# EAGLE board plan (EAGLE 6.2)
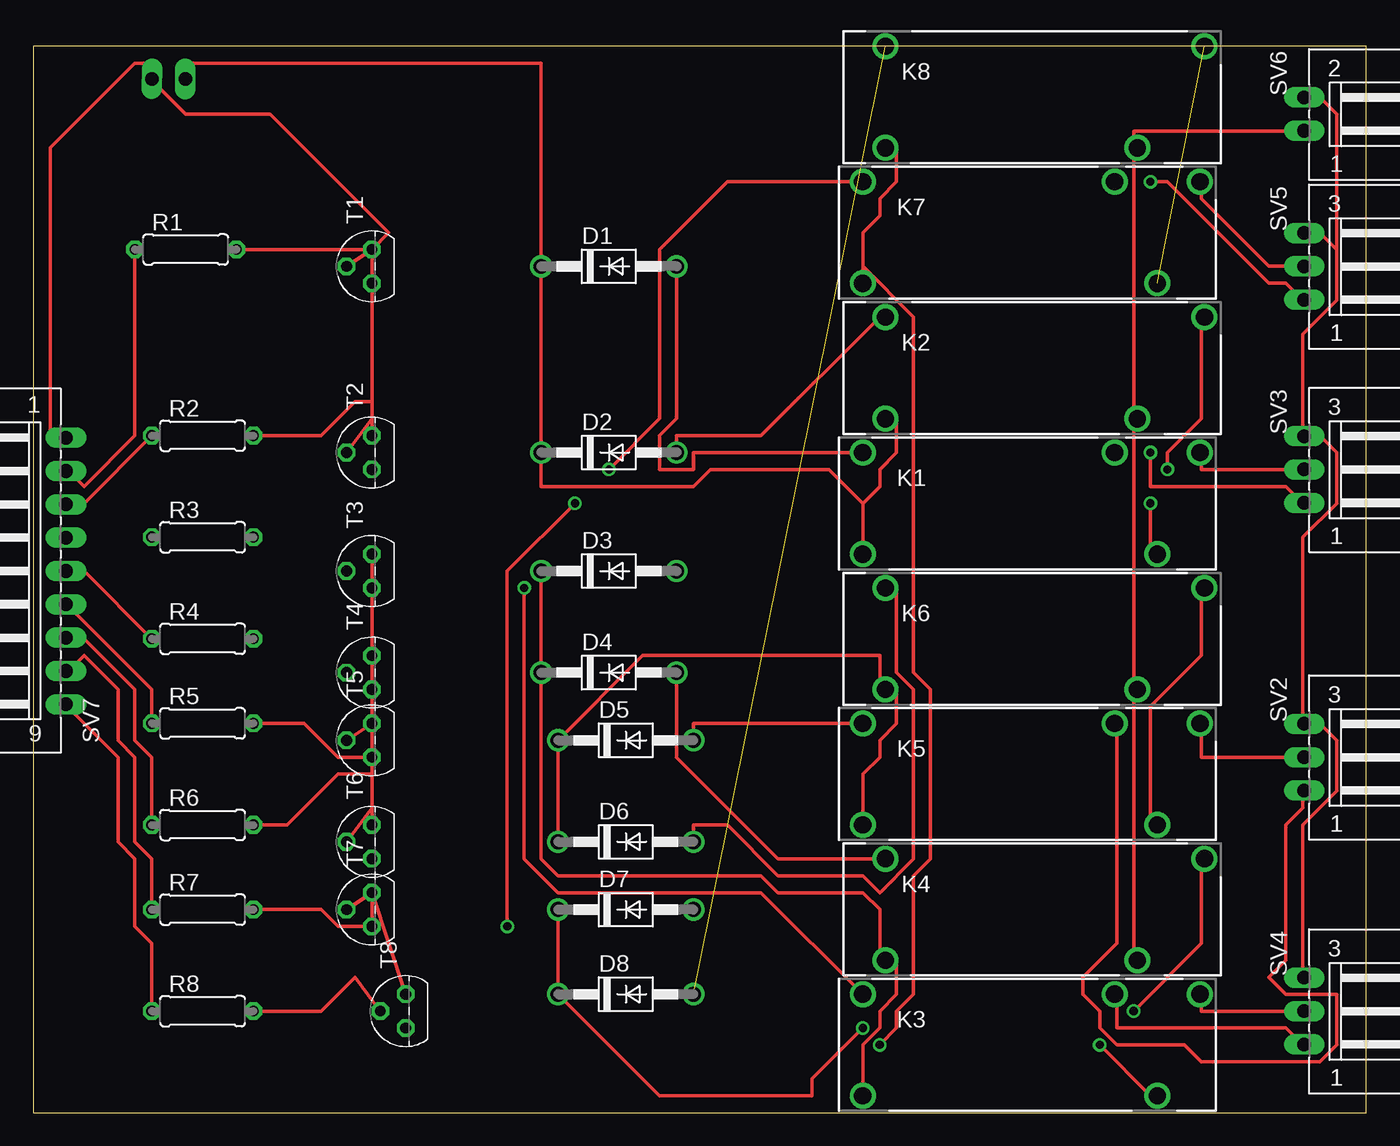
[diagram p0: board, top side]
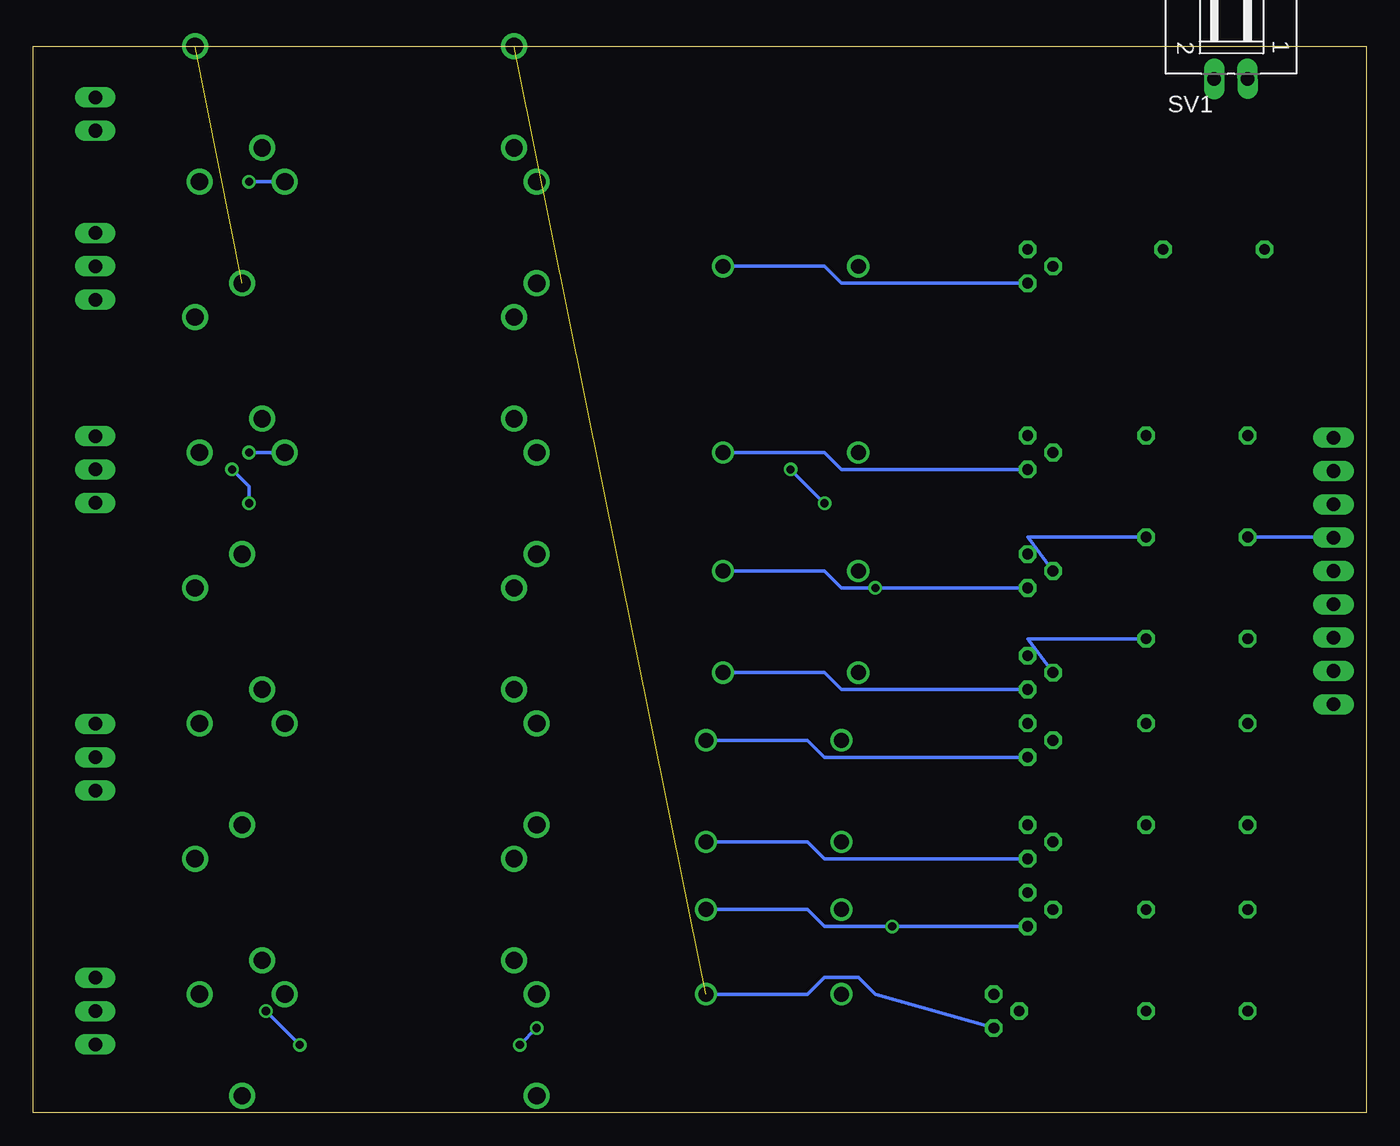
[diagram p1: board, bottom side, seen from below]

Size 100 x 80 mm. Coordinates in mm from the lower left corner, seen from the top.
Outline: 0,0 100,0 100,80 0,80 0,0
Copper layers (1*16): Top 0.035mm / dielectric 1.5mm / Bottom 0.035mm
Design rules: minimum track width 10mil, minimum drill 24mil, track to track 8mil, track to pad 8mil, pad to pad 8mil, via to via 8mil, smd to smd 8mil, copper to edge 40mil, drill to drill 8mil, minimum pad ring 10mil, minimum via ring 8mil, stop-mask expansion 4mil, vias tented up to drill 0mil, thermal gap 10mil

## Footprints (pad centres in the part's own frame; a part is rotated, then mirrored left to right if it is on the bottom)
DO41-10 = drill 1.118: A 5.08,0; C -5.08,0
RY-II = drill 1.3: 11 9.4,-3.81; 12 6.2,3.81; 14 12.6,3.81; A1 -12.7,-3.81; A2 -12.7,3.81
RY-II1 = drill 1.3: 11 7.9,-3.81; 14 12.94,3.81; A1 -11,-3.81; A2 -11,3.81
0207/7 = drill 0.813 octagon: 1 -3.81,0; 2 3.81,0
L02P = drill 1.016 long: 1 1.25,-6.25; 2 -1.25,-6.25
L03P = drill 1.016 long: 1 2.5,-6.25; 2 0,-6.25; 3 -2.5,-6.25
L09P = drill 1.016 long: 1 10,-6.25; 2 7.5,-6.25; 3 5,-6.25; 4 2.5,-6.25; 5 0,-6.25; 6 -2.5,-6.25; 7 -5,-6.25; 8 -7.5,-6.25; 9 -10,-6.25
TO92 = drill 0.813 octagon: 1 1.27,0; 2 0,1.905; 3 -1.27,0

## Placement (x,y rotation side)
D1  1N4004  [DO41-10]  43.18,63.5 0 top
D2  1N4004  [DO41-10]  43.18,49.53 0 top
D3  1N4004  [DO41-10]  43.18,40.64 0 top
D4  1N4004  [DO41-10]  43.18,33.02 0 top
D5  1N4004  [DO41-10]  44.45,27.94 0 top
D6  1N4004  [DO41-10]  44.45,20.32 0 top
D7  1N4004  [DO41-10]  44.45,15.24 0 top
D8  1N4004  [DO41-10]  44.45,8.89 0 top
K1  RY210005  [RY-II]  74.93,45.72 0 top
K2  RY230005  [RY-II1]  74.93,55.88 0 top
K3  RY210005  [RY-II]  74.93,5.08 0 top
K4  RY230005  [RY-II1]  74.93,15.24 0 top
K5  RY210005  [RY-II]  74.93,25.4 0 top
K6  RY230005  [RY-II1]  74.93,35.56 0 top
K7  RY210005  [RY-II]  74.93,66.04 0 top
K8  RY230005  [RY-II1]  74.93,76.2 0 top
R1  [0207/7]  11.43,64.77 0 top
R2  [0207/7]  12.7,50.8 0 top
R3  [0207/7]  12.7,43.18 0 top
R4  [0207/7]  12.7,35.56 0 top
R5  [0207/7]  12.7,29.21 0 top
R6  [0207/7]  12.7,21.59 0 top
R7  [0207/7]  12.7,15.24 0 top
R8  [0207/7]  12.7,7.62 0 top
SV1  [L02P]  10.16,83.82 0.1 bottom
SV2  [L03P]  101.6,26.67 270 top
SV3  [L03P]  101.6,48.26 270 top
SV4  [L03P]  101.6,7.62 270 top
SV5  [L03P]  101.6,63.5 270 top
SV6  [L02P]  101.6,74.93 270 top
SV7  [L09P]  -3.81,40.64 90 top
T1  [TO92]  25.4,63.5 90 top
T2  [TO92]  25.4,49.53 90 top
T3  [TO92]  25.4,40.64 90 top
T4  [TO92]  25.4,33.02 90 top
T5  [TO92]  25.4,27.94 90 top
T6  [TO92]  25.4,20.32 90 top
T7  [TO92]  25.4,15.24 90 top
T8  [TO92]  27.94,7.62 90 top

## Library data of the parts
D1-D8 = diode
K1 K3 K5 K7 = relay; MF: TYCO ELECTRONICS; MPN: RY210005; OC_FARNELL: unknown; OC_NEWARK: 08H3762
K2 K4 K6 K8 = relay; OC_FARNELL: unknown; OC_NEWARK: unknown
R1-R8 = resistor
SV1-SV7 = con-amp-mt; OC_FARNELL: unknown; OC_NEWARK: unknown
T1-T8 = transistor

## Nets
N$1: R1.2 T1.2
N$2: R2.2 T2.2
N$3: SV1.1 SV7.1 T1.1 T2.1
N$4: R3.2 T3.2
N$5: D1.A K1.A2 T1.3
N$6: D2.A K2.A2 T2.3
N$7: D1.C D2.C K1.A1 K2.A1 SV1.2
N$8: R4.2 T4.2
N$9: K1.11 K2.14
N$10: SV2.3 SV3.3 SV4.3 SV5.3 SV6.2
N$11: D3.A K3.A2 T3.3
N$12: D4.A K4.A2 T4.3
N$13: D3.C D4.C K3.A1 K4.A1
N$14: K3.11 K4.14
N$15: K3.14 SV4.2
N$16: K3.12 SV4.1
N$17: K1.14 SV3.2
N$18: K1.12 SV3.1
N$19: K2.11 K4.11 K6.11 K8.11 SV6.1
N$20: R1.1 SV7.2
N$21: R5.2 T5.2
N$22: R6.2 T6.2
N$23: T3.1 T4.1 T5.1 T6.1
N$24: D5.A K5.A2 T5.3
N$25: D6.A K6.A2 T6.3
N$26: D5.C D6.C K5.A1 K6.A1
N$27: K5.11 K6.14
N$28: R7.2 T7.2
N$29: R8.2 T8.2
N$30: T7.1 T8.1
N$31: D7.A K7.A2 T7.3
N$32: D8.A K8.A2 T8.3
N$33: D7.C D8.C K7.A1 K8.A1
N$34: K7.11 K8.14
N$35: K7.14 SV5.2
N$36: K7.12 SV5.1
N$37: K5.14 SV2.2
N$38: K5.12 SV2.1
N$39: R8.1 SV7.9
N$40: R6.1 SV7.7
N$41: R5.1 SV7.6
N$42: R4.1 SV7.5
N$43: R3.1 SV7.4
N$44: R2.1 SV7.3
N$45: R7.1 SV7.8

## Tracks (layer width: path | path; a pad name or v marks a point on that pad's centre or on a via)
N$1
  Top 0.254: R1.2 25.4,64.77 T1.2
N$2
  Top 0.254: R2.2 21.59,50.8 24.13,53.34 25.4,53.34 25.4,52.07 T2.2
N$3
  Top 0.254: T2.1 T1.1 26.67,66.04 17.78,74.93 11.43,74.93 8.89,77.47 SV1.1 8.89,78.74 7.62,78.74 1.27,72.39 1.27,50.8 SV7.1
N$4
  Bottom 0.254: R3.2 25.4,43.18 T3.2
N$5
  Top 0.254: K1.A2 49.53,49.53 49.53,48.26 46.99,48.26 46.99,50.8 48.26,52.07 D1.A
  Bottom 0.254: D1.A 40.64,63.5 39.37,62.23 T1.3
N$6
  Top 0.254: D2.A 48.26,50.8 54.61,50.8 63.5,59.69 K2.A2
  Bottom 0.254: D2.A 40.64,49.53 39.37,48.26 T2.3
N$7
  Top 0.254: 62.23,45.72 K1.A1 | 62.23,45.72 63.5,46.99 63.5,48.26 64.77,49.53 64.77,52.07 K2.A1 | SV1.2 11.43,78.74 38.1,78.74 D1.C D2.C 38.1,46.99 49.53,46.99 50.8,48.26 59.69,48.26 62.23,45.72
N$8
  Bottom 0.254: R4.2 25.4,35.56 T4.2
N$9  (via drill 0.61)
  Top 0.254: v83.82,45.72 83.82,41.91 K1.11 | v85.09,48.26 85.09,49.53 87.63,52.07 87.63,59.69 K2.14
  Bottom 0.254: v83.82,45.72 83.82,46.99 v85.09,48.26
N$10
  Top 0.254: SV4.3 95.25,10.16 95.25,21.59 97.79,24.13 97.79,27.94 96.52,29.21 SV2.3 95.25,29.21 95.25,43.18 97.79,45.72 97.79,49.53 96.52,50.8 SV3.3 95.25,50.8 95.25,58.42 97.79,60.96 97.79,64.77 | 97.79,64.77 96.52,66.04 SV5.3 | 97.79,64.77 97.79,74.93 96.52,76.2 SV6.2
N$11  (via drill 0.61)
  Top 0.254: K3.A2 54.61,16.51 39.37,16.51 36.83,19.05 v36.83,39.37
  Bottom 0.254: D3.A 40.64,40.64 39.37,39.37 v36.83,39.37 T3.3
N$12
  Top 0.254: D4.A 48.26,26.67 55.88,19.05 63.5,19.05 K4.A2
  Bottom 0.254: D4.A 40.64,33.02 39.37,31.75 T4.3
N$13
  Top 0.254: D3.C D4.C 38.1,19.05 39.37,17.78 54.61,17.78 55.88,16.51 62.23,16.51 63.5,15.24 63.5,11.43 K4.A1 64.77,11.43 64.77,8.89 63.5,7.62 63.5,6.35 62.23,5.08 K3.A1
N$14  (via drill 0.61)
  Top 0.254: v80.01,5.08 83.82,1.27 K3.11 | v82.55,7.62 87.63,12.7 87.63,19.05 K4.14
  Bottom 0.254: v82.55,7.62 v80.01,5.08
N$15
  Top 0.254: SV4.2 95.25,7.62 87.63,7.62 87.63,8.89 K3.14
N$16
  Top 0.254: SV4.1 95.25,5.08 93.98,6.35 81.28,6.35 81.28,8.89 K3.12
N$17
  Top 0.254: SV3.2 95.25,48.26 87.63,48.26 87.63,49.53 K1.14
N$18  (via drill 0.61)
  Top 0.254: v83.82,49.53 83.82,46.99 93.98,46.99 95.25,45.72 SV3.1
  Bottom 0.254: v83.82,49.53 81.28,49.53 K1.12
N$19
  Top 0.254: 82.55,31.75 82.55,11.43 K4.11 | 82.55,31.75 K6.11 82.55,31.75 | 82.55,31.75 82.55,52.07 | 82.55,52.07 K2.11 82.55,52.07 | 82.55,52.07 82.55,72.39 | 82.55,72.39 K8.11 82.55,72.39 | 82.55,72.39 82.55,73.66 95.25,73.66 SV6.1
N$20
  Top 0.254: R1.1 7.62,50.8 3.81,46.99 2.54,48.26 SV7.2
N$21
  Top 0.254: R5.2 20.32,29.21 22.86,26.67 25.4,26.67 25.4,29.21 T5.2
N$22
  Top 0.254: R6.2 19.05,21.59 22.86,25.4 25.4,25.4 25.4,22.86 T6.2
N$23
  Top 0.254: T6.1 T5.1 T4.1 T3.1
N$24
  Top 0.254: K5.A2 49.53,29.21 D5.A
  Bottom 0.254: D5.A 41.91,27.94 40.64,26.67 T5.3
N$25
  Top 0.254: D6.A 49.53,21.59 52.07,21.59 55.88,17.78 62.23,17.78 63.5,16.51 66.04,19.05 66.04,31.75 64.77,33.02 64.77,39.37 K6.A2
  Bottom 0.254: D6.A 41.91,20.32 40.64,19.05 T6.3
N$26
  Top 0.254: D6.C D5.C 45.72,34.29 63.5,34.29 63.5,31.75 K6.A1 64.77,31.75 64.77,29.21 63.5,27.94 63.5,26.67 62.23,25.4 K5.A1
N$27
  Top 0.254: K5.11 83.82,21.59 83.82,30.48 87.63,34.29 87.63,39.37 K6.14
N$28
  Top 0.254: R7.2 21.59,15.24 22.86,13.97 25.4,13.97 25.4,16.51 T7.2
N$29
  Top 0.254: R8.2 21.59,7.62 24.13,10.16 T8.2
N$30
  Top 0.254: T8.1 T7.1
N$31  (via drill 0.61)
  Top 0.254: K7.A2 52.07,69.85 46.99,64.77 46.99,52.07 v43.18,48.26 | v40.64,45.72 35.56,40.64 v35.56,13.97
  Bottom 0.254: D7.A 41.91,15.24 40.64,13.97 v35.56,13.97 T7.3 | v40.64,45.72 v43.18,48.26
N$32  (1 unrouted)
  Bottom 0.254: D8.A 41.91,8.89 40.64,10.16 38.1,10.16 36.83,8.89 T8.3
N$33  (via drill 0.61)
  Top 0.254: D7.C D8.C 46.99,1.27 58.42,1.27 58.42,2.54 v62.23,6.35 | 62.23,63.5 62.23,66.04 63.5,67.31 63.5,68.58 64.77,69.85 64.77,72.39 K8.A1 | 62.23,63.5 K7.A1 | v63.5,5.08 64.77,6.35 64.77,7.62 66.04,8.89 66.04,17.78 67.31,19.05 67.31,31.75 66.04,33.02 66.04,59.69 62.23,63.5
  Bottom 0.254: v63.5,5.08 v62.23,6.35
N$34  (1 unrouted)
N$35
  Top 0.254: SV5.2 95.25,63.5 92.71,63.5 87.63,68.58 87.63,69.85 K7.14
N$36  (via drill 0.61)
  Top 0.254: v83.82,69.85 85.09,69.85 92.71,62.23 93.98,62.23 95.25,60.96 SV5.1
  Bottom 0.254: v83.82,69.85 81.28,69.85 K7.12
N$37
  Top 0.254: SV2.2 95.25,26.67 87.63,26.67 87.63,29.21 K5.14
N$38
  Top 0.254: SV2.1 95.25,24.13 95.25,22.86 93.98,21.59 93.98,11.43 92.71,10.16 93.98,8.89 97.79,8.89 97.79,5.08 96.52,3.81 87.63,3.81 86.36,5.08 81.28,5.08 80.01,6.35 80.01,7.62 78.74,8.89 78.74,10.16 81.28,12.7 81.28,29.21 K5.12
N$39
  Top 0.254: R8.1 8.89,12.7 7.62,13.97 7.62,19.05 6.35,20.32 6.35,26.67 2.54,30.48 SV7.9
N$40
  Top 0.254: R6.1 8.89,26.67 7.62,27.94 7.62,31.75 3.81,35.56 2.54,35.56 SV7.7
N$41
  Top 0.254: R5.1 8.89,31.75 2.54,38.1 SV7.6
N$42
  Top 0.254: R4.1 3.81,40.64 2.54,40.64 SV7.5
N$43
  Bottom 0.254: R3.1 2.54,43.18 SV7.4
N$44
  Top 0.254: R2.1 3.81,45.72 2.54,45.72 SV7.3
N$45
  Top 0.254: R7.1 8.89,19.05 7.62,20.32 7.62,26.67 6.35,27.94 6.35,31.75 3.81,34.29 2.54,33.02 SV7.8